# EAGLE board CarteCapteurs (EAGLE 5.07)
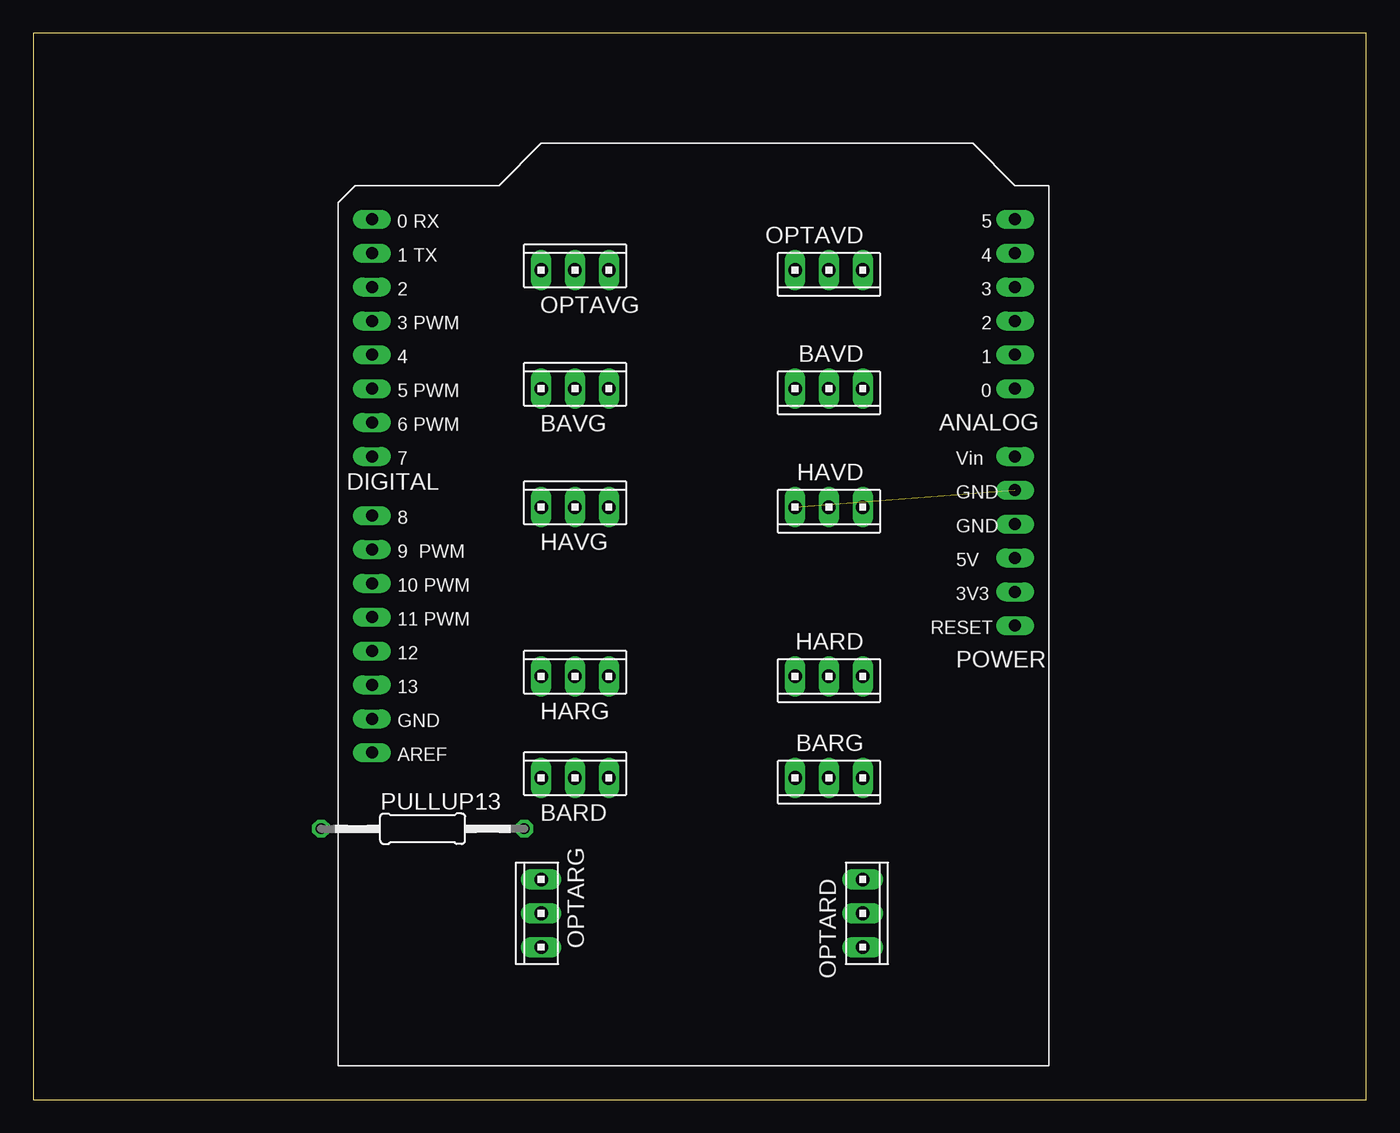
[diagram p0: board, top side]
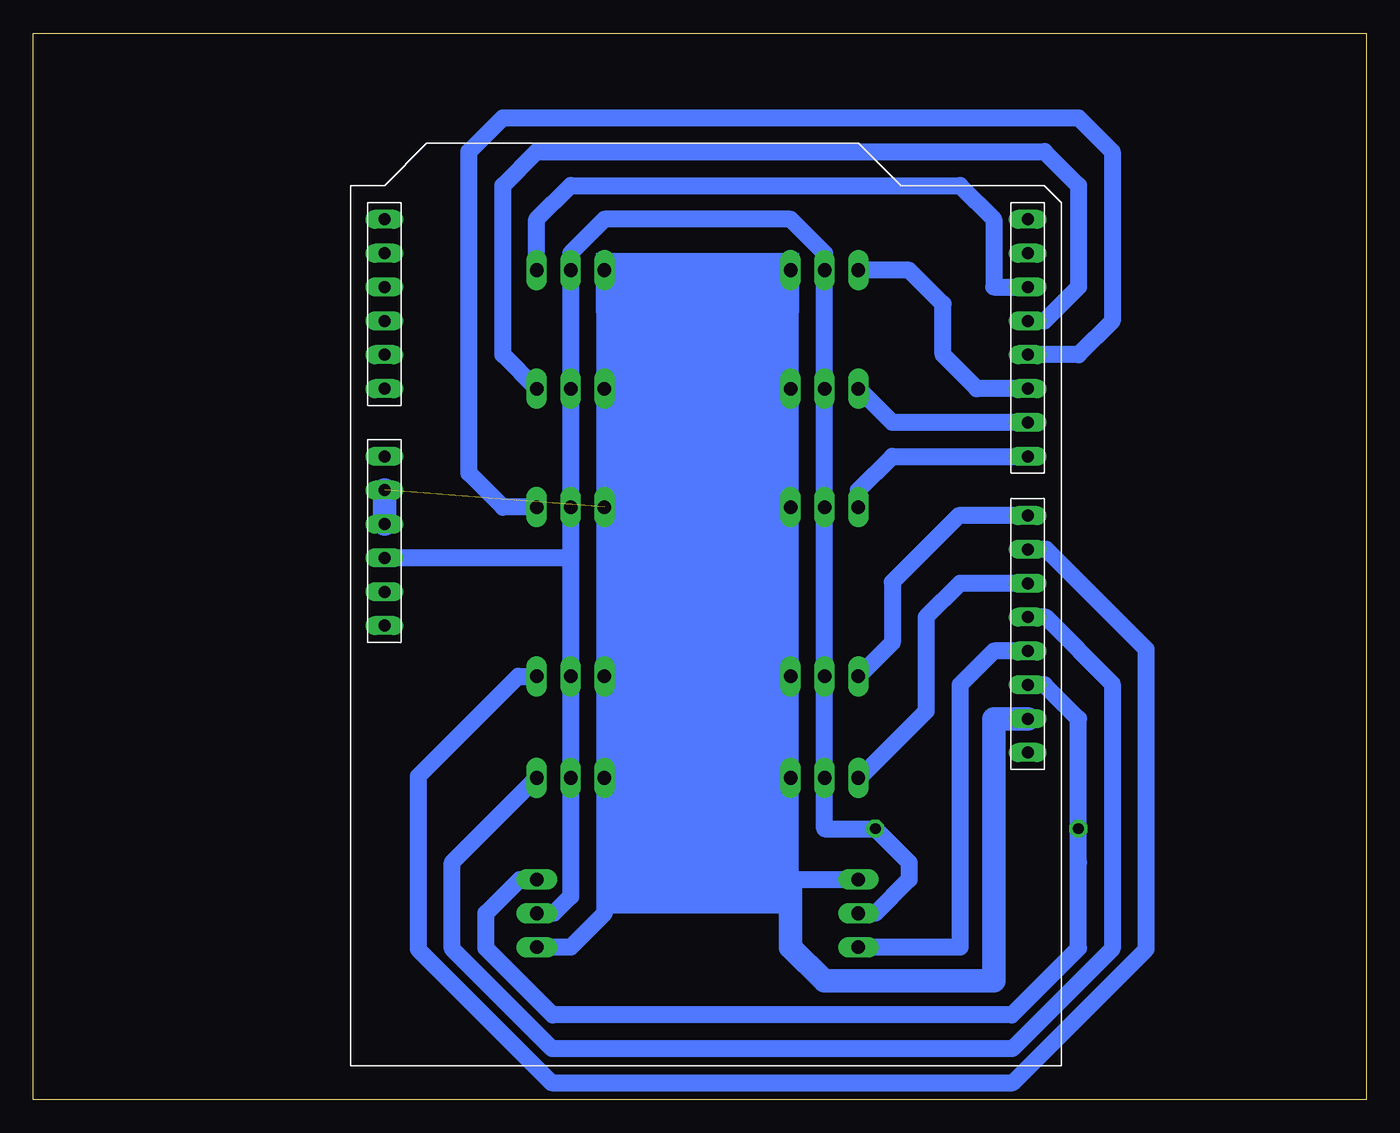
[diagram p1: board, bottom side, seen from below]

Size 100 x 80 mm. Coordinates in mm from the lower left corner, seen from the top.
Outline: 0,0 100,0 100,80 0,80 0,0
Copper layers (1*16): Top 0.035mm / dielectric 1.5mm / Bottom 0.035mm
Design rules "default": minimum track width 10mil, minimum drill 24mil, track to track 8mil, track to pad 8mil, pad to pad 8mil, via to via 8mil, smd to smd 8mil, copper to edge 40mil, drill to drill 8mil, minimum pad ring 10mil, minimum via ring 8mil, stop-mask expansion 4mil, vias tented up to drill 0mil, thermal gap 10mil

## Footprints (pad centres in the part's own frame; a part is rotated, then mirrored left to right if it is on the bottom)
10X03MTA = drill 1.016 long: 1 2.54,0; 2 0,0; 3 -2.54,0
0207/15 = drill 0.813 octagon: 1 -7.62,0; 2 7.62,0
SHIELD = drill 0.9 pad 1.27 long: 0_RX -25.4,27.94; 1_TX -25.4,25.4; 2 -25.4,22.86; 3 -25.4,20.32; 3V3 22.86,0; 4 -25.4,17.78; 5 -25.4,15.24; 5V 22.86,2.54; 6 -25.4,12.7; 7 -25.4,10.16; 8 -25.4,5.715; 9 -25.4,3.175; 10 -25.4,0.635; 11 -25.4,-1.905; 12 -25.4,-4.445; 13 -25.4,-6.985; A_0 22.86,15.24; A_1 22.86,17.78; A_2 22.86,20.32; A_3 22.86,22.86; A_4 22.86,25.4; A_5 22.86,27.94; AREF -25.4,-12.065; GND0 -25.4,-9.525; GND1 22.86,7.62; GND2 22.86,5.08; RESET 22.86,-2.54; VIN 22.86,10.16

## Placement (x,y rotation side)
BARD  [10X03MTA]  40.64,24.13 0 top
BARG  [10X03MTA]  59.69,24.13 180 top
BAVD  [10X03MTA]  59.69,53.34 180 top
BAVG  [10X03MTA]  40.64,53.34 0 top
HARD  [10X03MTA]  59.69,31.75 180 top
HARG  [10X03MTA]  40.64,31.75 0 top
HAVD  [10X03MTA]  59.69,44.45 180 top
HAVG  [10X03MTA]  40.64,44.45 0 top
OPTARD  [10X03MTA]  62.23,13.97 270 top
OPTARG  [10X03MTA]  38.1,13.97 90 top
OPTAVD  [10X03MTA]  59.69,62.23 180 top
OPTAVG  [10X03MTA]  40.64,62.23 0 top
PULLUP13  1200Ohm  [0207/15]  29.21,20.32 0 top
U$1  ARDUINO-USBLONG_PADS_TEXT  [SHIELD]  50.8,38.1 0 top

## Library data of the parts
BARD BARG BAVD BAVG HARD HARG HAVD HAVG OPTARD OPTARG OPTAVD OPTAVG = con-amp
PULLUP13 = resistor
U$1 = Arduino-Various

## Nets
3V3: U$1.3V3
+5V: BARG.2 BAVD.2 BAVG.2 HARD.2 HARG.2 HAVD.2 HAVG.2 OPTARD.2 OPTARG.2 OPTAVD.2 OPTAVG.2 PULLUP13.2 U$1.5V
GND: BARD.1 BARG.1 BAVD.1 BAVG.1 HARD.1 HARG.1 HAVD.1 HAVG.1 OPTARD.1 OPTARG.1 OPTAVD.1 OPTAVG.1 U$1.GND0 U$1.GND1 U$1.GND2
HARG: HARD.3 U$1.9
N$1: BAVG.3 U$1.6
N$2: OPTARG.3 U$1.12
N$3: HAVD.3 U$1.4
N$4: OPTAVD.3 U$1.2
N$5: BAVD.3 U$1.3
N$6: OPTAVG.3 U$1.5
N$7: HARG.3 U$1.8
N$8: BARG.3 U$1.11
N$9: HAVG.3 U$1.7
N$10: BARD.3 U$1.10
PULLUP13: OPTARD.3 PULLUP13.1 U$1.13
VIN: U$1.VIN

## Tracks (layer width: path | path; a pad name or v marks a point on that pad's centre or on a via)
+5V
  Bottom 1.27: 59.69,40.64 HAVD.2 BAVD.2 OPTAVD.2 59.69,63.5 57.15,66.04 43.18,66.04 40.64,63.5 OPTAVG.2 BAVG.2 HAVG.2 HARG.2 40.64,20.32 PULLUP13.2 34.29,17.78 34.29,16.51 36.83,13.97 OPTARG.2 | 59.69,40.64 HARD.2 BARG.2 59.69,15.24 60.96,13.97 OPTARD.2 | 59.69,40.64 U$1.5V
GND  (1 unrouted)
  Bottom 1.27: OPTARD.1 59.69,11.43 57.15,13.97 BARG.1 HARD.1 HAVD.1 BAVD.1 OPTAVD.1 OPTAVG.1 BAVG.1 HAVG.1 HARG.1 BARD.1 43.18,16.51 OPTARG.1
  Bottom 1.778: U$1.GND0 27.94,28.57 27.94,8.89 40.64,8.89 43.18,11.43 43.18,16.51 | U$1.GND2 U$1.GND1
HARG
  Bottom 1.27: HARD.3 63.62,31.75 71.12,24.25 71.12,11.27 61.12,1.27 26.51,1.27 16.51,11.27 16.51,33.77 24.01,41.27 U$1.9
N$1
  Bottom 1.27: U$1.6 35.56,50.8 BAVG.3
N$2
  Bottom 1.27: U$1.12 27.94,33.66 30.48,31.11 30.48,11.43 OPTARG.3
N$3
  Bottom 1.27: HAVD.3 64.77,44.45 67.31,46.99 67.31,71.12 64.77,73.66 21.59,73.66 19.05,71.12 19.05,58.42 21.59,55.88 U$1.4
N$4
  Bottom 1.27: OPTAVD.3 62.23,66.04 59.69,68.58 30.48,68.58 27.94,66.04 27.94,60.96 U$1.2
N$5
  Bottom 1.27: BAVD.3 64.77,55.88 64.77,68.58 62.23,71.12 24.13,71.12 21.59,68.58 21.59,60.96 24.13,58.42 U$1.3
N$6
  Bottom 1.27: U$1.5 29.21,53.34 31.75,55.88 31.75,59.69 34.29,62.23 OPTAVG.3
N$7
  Bottom 1.27: U$1.8 30.56,43.81 35.56,38.81 35.56,34.29 HARG.3
N$8
  Bottom 1.27: U$1.11 24.05,36.2 19.05,31.2 19.05,11.31 26.55,3.81 61.08,3.81 68.58,11.31 68.58,17.78 BARG.3
N$9
  Bottom 1.27: HAVG.3 38.1,45.72 35.56,48.26 U$1.7
N$10
  Bottom 1.27: U$1.10 30.48,38.73 33.02,36.2 33.02,29.13 38.02,24.13 BARD.3
PULLUP13
  Bottom 1.27: U$1.13 24.13,31.11 21.59,28.57 PULLUP13.1 21.59,17.78 21.59,11.35 26.59,6.35 61.04,6.35 66.04,11.35 66.04,13.97 63.5,16.51 OPTARD.3
(copper drawn outside any net)
  shapes: Bottom area x2